# Altium PCB PCB1.PcbDoc
Units mm, origin at the board's own origin, x right, y up, seen from the top; angles counter-clockwise.
Board outline 58.29 x 66.8 mm, 2 copper layers (Top Layer, Bottom Layer); 22 components, 16 nets, 75 pads, 0 vias.
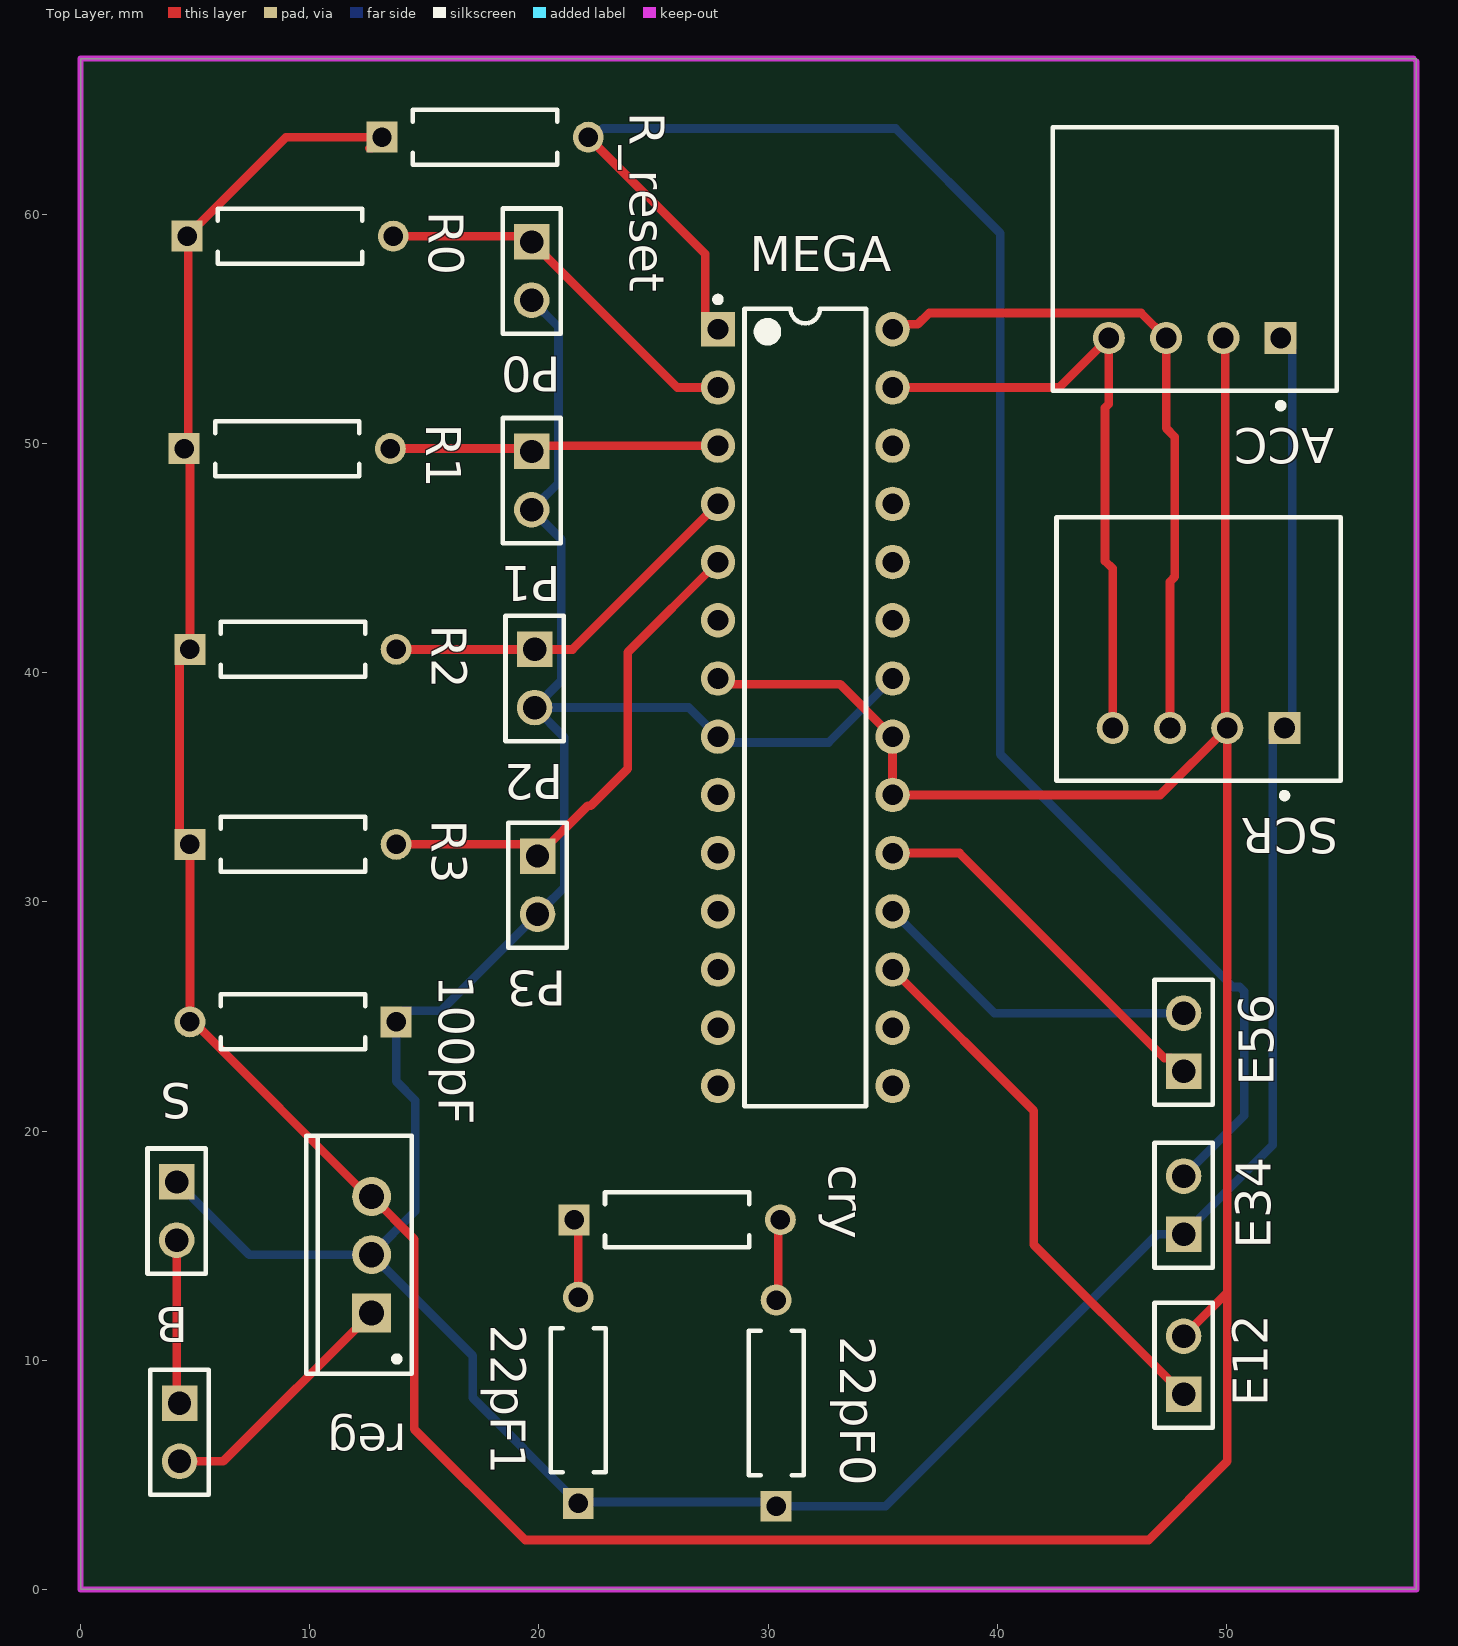
[diagram p0: Top Layer view]
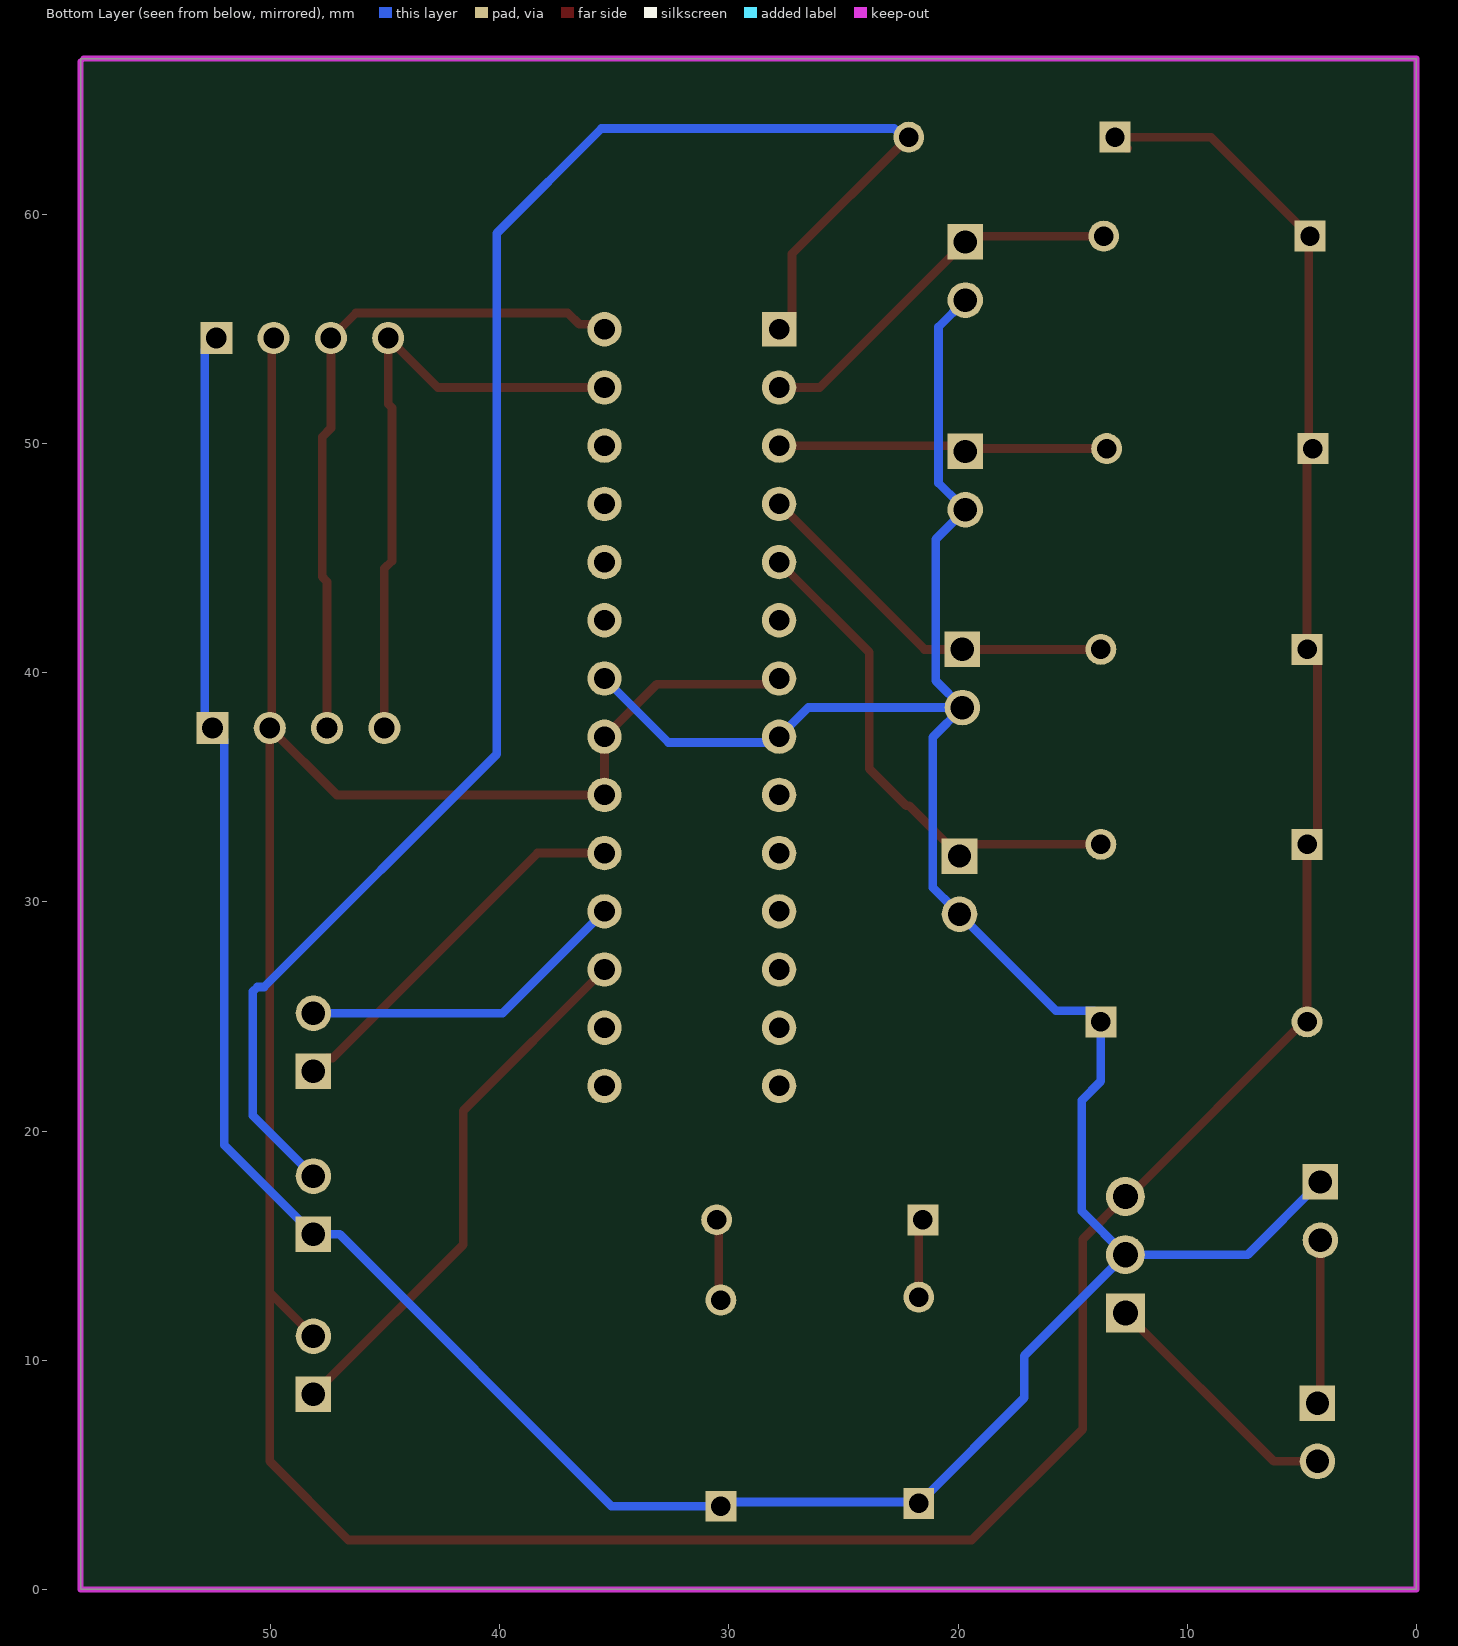
[diagram p1: Bottom Layer view, seen from below]
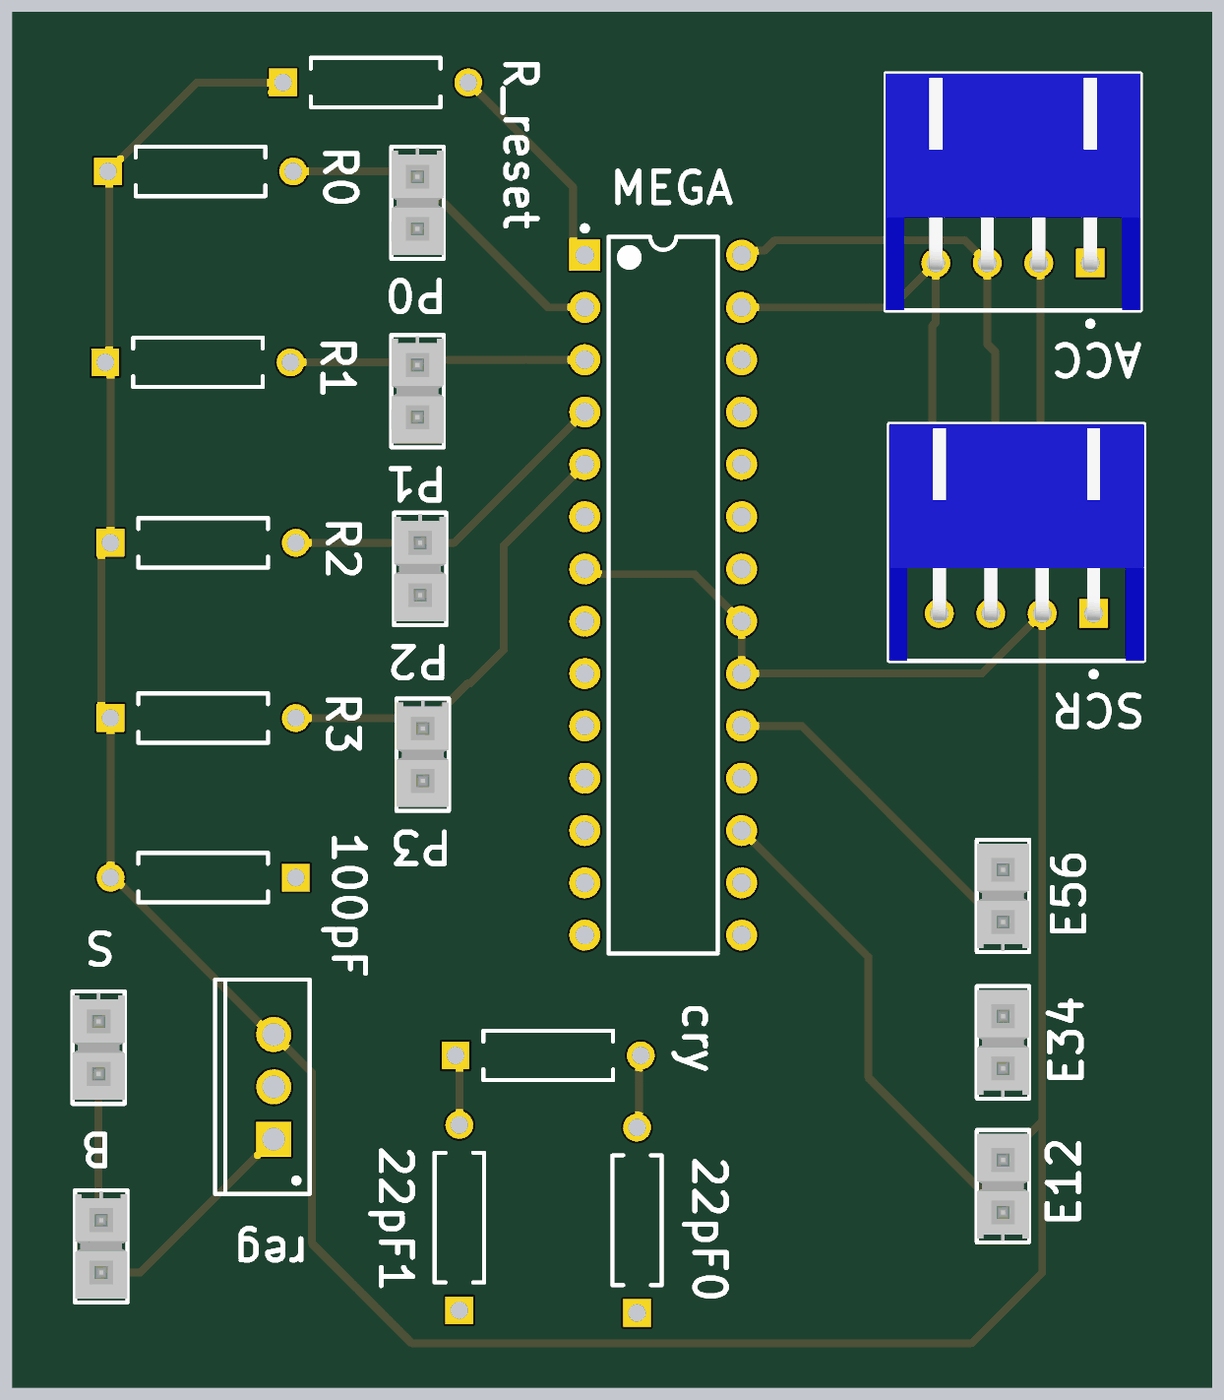
[diagram p2: 3D render of the assembled board from above, using the file's embedded part models]

## Layer stack, top to bottom
Top Solder: solder mask 0.0102, Solder Resist, Dk 3.5
Top Layer: signal copper 0.0356
Dielectric 1: dielectric 0.32, FR-4, Dk 4.8
Bottom Layer: signal copper 0.0356
Bottom Solder: solder mask 0.0102, Solder Resist, Dk 3.5

## Board outline
0,0 58.293,0 58.293,66.802 0,66.802

## Design rules (kind name [scope] priority, off if disabled: settings)
BoardOutlineClearance [All] p1: gap=0.2 ignorepadtopadclearanceinfootprint=FALSE except(0.4: Arc-SplitBarrior Arc-SplitContinuation Track-SplitBarrior Track-SplitContinuation SMDPad-SplitBarrior SMDPad-SplitContinuation THPad-SplitBarrior THPad-SplitContinuation Via-SplitBarrior Via-SplitContinuation Fill-SplitBarrior Fill-SplitContinuation Poly-SplitBarrior Poly-SplitContinuation Region-SplitBarrior Region-SplitContinuation Text-SplitBarrior Text-SplitContinuation)
Clearance "Clearance Bottom Layer" [OnLayer('Bottom Layer')] p1: gap=0.203 ignorepadtopadclearanceinfootprint=TRUE except(0.254: Arc-Text Track-Text SMDPad-Text THPad-Text Via-Text Fill-Text Poly-Text Region-Text Text-Text)
Clearance "Clearance Top Layer" [OnLayer('Top Layer')] p2: gap=0.203 ignorepadtopadclearanceinfootprint=TRUE except(0.254: Arc-Text Track-Text SMDPad-Text THPad-Text Via-Text Fill-Text Poly-Text Region-Text Text-Text)
Clearance [All] p3: gap=0.2 ignorepadtopadclearanceinfootprint=FALSE except(0.089: Arc-Arc Arc-Track Arc-SMDPad Track-Track Track-SMDPad SMDPad-SMDPad; 0.127: Arc-Via Track-Via SMDPad-Via THPad-Via Via-Via; 0.254: Arc-Text Track-Text SMDPad-Text THPad-Text Via-Text Fill-Text Poly-Text Region-Text Text-Text)
HoleSize [All] p1: absolutevalues=TRUE maxlimit=6.3 minlimit=0.2 maxpercent=80.000 minpercent=20.000
MinimumAnnularRing [All] p1: minimumring=0.076
MinimumSolderMaskSliver [All] p1: minsoldermaskwidth=0.1
PolygonConnect PolygonConnect_1 [All] p1: thpad.connectstyle=Relief thpad.reliefconductorwidth=0.508 thpad.reliefentries=4 thpad.polygonreliefangle="90 Angle" thpad.airgapwidth=0.254 smdpad.connectstyle=Relief smdpad.reliefconductorwidth=0.508 smdpad.reliefentries=4 smdpad.polygonreliefangle="90 Angle" smdpad.airgapwidth=0.254 via.connectstyle=Direct via.reliefconductorwidth=0.508 via.reliefentries=4 via.polygonreliefangle="90 Angle" via.airgapwidth=0.254
RoutingCorners [All] p1: cornerstyle=Round minsetback=2.54 maxsetback=2.54
RoutingVias [All] p1: holewidth=0.5 width=1 viastyle="Through Hole" minholewidth=0.2 minwidth=0.45 maxholewidth=1 maxwidth=2
SilkToSilkClearance [All] p1: silktosilkclearance=0.1
SilkToSolderMaskClearance [IsPad] p1: minsilkscreentomaskgap=0.1 clearancetoexposedcopper=TRUE
SolderMaskExpansion [All] p1: expansion=0.102 istentingtop=FALSE
Width [All] p1: maxlimit=2.54 minlimit=0.089 preferedwidth=0.381
25 further rules are at their usual default settings.

## Components (designator, comment, footprint, x,y, rotation, side; value= is the part's Value field where it differs from the comment)
22pF0 "MFR-25FBF52-475R" RESA60-630X240 30.353,8.128 r90 top value=475
22pF1 "MFR-25FBF52-475R" RESA60-630X240 21.717,8.255 r90 top value=475
100pF "MFR-25FBF52-475R" RESA60-630X240 9.271,24.765 r180 top value=475
ACC "S4B-XH-A(LF)(SN)" JST-S4B-XH-A(LF)(SN)_V 48.621,54.61 r180 top
B "battery connector" SMTC-TSW-102-26-XX-S 4.318,8.128 r270 top
cry "MFR-25FBF52-475R" RESA60-630X240 26.035,16.129 r0 top value=475
E12 "battery connector" SMTC-TSW-102-26-XX-S 48.133,8.509 r90 top
E34 "battery connector" SMTC-TSW-102-26-XX-S 48.133,15.494 r90 top
E56 "battery connector" SMTC-TSW-102-26-XX-S 48.133,22.606 r90 top
MEGA "ATMEGA328P-PU" ATML-28P3 31.623,38.481 r0 top (schematic designator U?)
P0 "battery connector" SMTC-TSW-102-26-XX-S 19.685,58.801 r270 top
P1 "battery connector" SMTC-TSW-102-26-XX-S 19.685,49.657 r270 top
P2 "battery connector" SMTC-TSW-102-26-XX-S 19.812,41.021 r270 top
P3 "battery connector" SMTC-TSW-102-26-XX-S 19.939,32.004 r270 top
R0 "MFR-25FBF52-475R" RESA60-630X240 9.144,59.055 r0 top value=475
R1 "MFR-25FBF52-475R" RESA60-630X240 9.017,49.784 r0 top value=475
R2 "MFR-25FBF52-475R" RESA60-630X240 9.271,41.021 r0 top value=475
R3 "MFR-25FBF52-475R" RESA60-630X240 9.271,32.512 r0 top value=475
R_reset "MFR-25FBF52-475R" RESA60-630X240 17.653,63.373 r0 top value=475
reg "L7805CV" TO220 12.7,14.605 r90 top
S "battery connector" SMTC-TSW-102-26-XX-S 4.191,17.78 r270 top
SCR "S4B-XH-A(LF)(SN)" JST-S4B-XH-A(LF)(SN)_V 48.788,37.592 r180 top

## Footprints (in the part's own frame and the unit in brackets; to place one, negate y for a bottom-side part, rotate by r counter-clockwise, add the part's x,y. Pads: shape width x height; smd on the part's side, far side on the other; paste and mask are expansions set on the pad)
ATML-28P3 [mm] "DIP, 28-Leads, Body 34.8x7.2mm, Pitch 2.54mm"
  rect 1.5x1.5 hole 0.9: 1(-3.81,16.51)
  round 1.5 hole 0.9: 2(-3.81,13.97) 3(-3.81,11.43) 4(-3.81,8.89) 5(-3.81,6.35) 6(-3.81,3.81) 7(-3.81,1.27) 8(-3.81,-1.27) 9(-3.81,-3.81) 10(-3.81,-6.35) 11(-3.81,-8.89) 12(-3.81,-11.43) 13(-3.81,-13.97) 14(-3.81,-16.51) 15(3.81,-16.51) 16(3.81,-13.97) 17(3.81,-11.43) 18(3.81,-8.89) 19(3.81,-6.35) 20(3.81,-3.81) 21(3.81,-1.27) 22(3.81,1.27) 23(3.81,3.81) 24(3.81,6.35) 25(3.81,8.89) 26(3.81,11.43) 27(3.81,13.97) 28(3.81,16.51)
  silkscreen extent -3.93,-17.4 2.65,17.93, body extent -3.95,-17.4 3.95,17.4, height 4.58
JST-S4B-XH-A(LF)(SN)_V [mm] "Header, 4-Leads, Body 12.4x11.5mm, Pitch 2.5mm"
  rect 1.4x1.4 hole 0.9: 1(-3.75,0)
  round 1.4 hole 0.9: 2(-1.25,0) 3(1.25,0) 4(3.75,0)
  silkscreen extent -6.2,-9.2 6.2,3.08, body extent -6.2,-9.2 6.2,2.3, height 6.15
RESA60-630X240 [mm] "Axial Resistor, 2-Leads, Dia 2.4mm, Body Length 6.3mm"
  rect 1.35x1.35 hole 0.85: 1(-4.5,0)
  round 1.35 hole 0.85: 2(4.5,0)
  silkscreen extent -3.15,-1.2 3.15,1.2, body extent -4.77,-1.19 4.77,1.2, height 2.4
SMTC-TSW-102-26-XX-S [mm] ".025 SQ Post Terminal Strip Assembly, 1x2 Pins, Vertical, 2.54mm Pitch, Male"
  rect 1.55x1.55 hole 1.02: 1(0,0)
  round 1.55 hole 1.02: 2(2.54,0)
  silkscreen extent -1.46,-1.27 4,1.27, body extent -1.4,-1.27 3.81,1.27, height 8.38
TO220 [mm] "TO, Thru-Hole, Vertical, Heatsink Mounted; 3 In-Line Leads; Pitch 2.54 mm"
  rect 1.7x1.7 hole 1.1: 1(-2.54,0)
  round 1.7 hole 1.1: 2(0,0) 3(2.54,0)
  silkscreen extent -5.2,-1.75 5.2,2.85, body extent -5.25,-1.8 5.25,2.9, height 19.7

## Part data
22pF0 22pF1 100pF cry R0 R1 R2 R3 R_reset: library part CMP-009-00056-3, "Axial Resistor, 475 Ohm, +/- 1%, 0.25 W, -55 to 155 degC, 2-Pin THD, RoHS, Bulk", Case/Package=Axial, Manufacturer=Yageo, Max Operating Temperature=155°C, Min Operating Temperature=-55°C, Package Description="2-Pin Axial Lead, Dia 2.4 mm, Body Length 6.3 mm", Package Quantity=200, Package Reference=MFR-25, Power=250mW, Tolerance=1%, Voltage Rating=250V, Datasheet URL=http://www.yageo.com/documents/recent/Yageo%20LR_MFR_2013.pdf, Datasheet Version=Apr-13, Manufacturer URL=http://www.yageo.com/, Mounting Technology=TH, Packaging=Bulk, RoHS Compliant=True
ACC SCR: library part CMP-002-00034-1, "Male Header, Pitch 2.5 mm, 1 x 4 Position, Height 6.1 mm, Tail Length 3.4 mm, -25 to 85 degC, RoHS, Bulk", Manufacturer=JST, Max Operating Temperature=85°C, Min Operating Temperature=-25°C, Package Description="XH Series Disconnectable Crimp Style Connector, Pitch 2.5 mm, 1 x 4 Position, Height 6.1 mm, Tail Length 3.4 mm", Case/Package=S4B-XH-A(LF)(SN), Connector Type=Header, Datasheet URL=http://www.jst-mfg.com/product/pdf/eng/eXH.pdf, Datasheet Version=May-16, Gender=Male, Manufacturer URL=http://www.jst.com/home2.html, Mounting Technology=TH, Package Reference=S4B-XH-A(LF)(SN), RoHS Compliant=Unknown
B E12 E34 E56 P0 P1 P2 P3 S: library part CMP-002-00089-1, "Headers & Wire Housings Classic PCB Header Strips, 0.100 pitch", Flammability Rating="UL94 V-0", Housing Color=Black, Max Current Rating=7.6A, Max Operating Temperature=125°C, Max Voltage Rating (AC)=550V, Min Operating Temperature=-55°C, Package Quantity=1, Voltage Rating=500V, Contact Gender=Male, Contact Material=Bronze, Contact Mating Length=5.84mm, Contact Plating=Gold, Contact Post Length=3.2mm, Contact Type=-, Depth=2.54mm, Gender=Male, Housing Material=Polyester, Length=5.08mm, Number of Contacts=2, Number of Positions=2, Number of Rows=1, Orientation=Vertical, Packaging=Bulk, Pitch=2.54mm, Radiation Hardening=No, REACH SVHC="No SVHC", RoHS Compliant=Yes, Series=TSW, Termination="Through Hole", Weight=0.001257oz
MEGA: library part CMP-020-00004-2, "8-Bit Microcontroller with 32 KBytes In-System Programmable Flash, 23 I/Os, -40 to 85 degC, 28-Pin PDIP (28P3), RoHS, Tube", Case/Package=DIP, Manufacturer=Atmel, Max Clock Frequency=20MHz, Max Operating Temperature=85°C, Max Supply Voltage=5.5V, Min Operating Temperature=-40°C, Min Supply Voltage=1.8V, Package Description="28-Pin Plastic Dual Inline Package, Body 34.671 x 7.3025 mm, Pitch 2.54 mm", Package Quantity=14, Package Reference=28P3, Package Version="Rev. B, 09/2001", Datasheet URL=http://www.atmel.com/images/Atmel-8271-8-bit-AVR-Microcontroller-ATmega48A-48PA-88A-88PA-168A-168PA-328-328P_datasheet_Complete.pdf, Datasheet Version="Rev. 8271J, 11/2015", Density=32KB, Ethernet Channels=0, I/Os=23, Interface=USART, Manufacturer URL=http://www.atmel.com/, Mounting Technology=TH, Package URL=http://www.atmel.com/images/Atmel-8271-8-bit-AVR-Microcontroller-ATmega48A-48PA-88A-88PA-168A-168PA-328-328P_datasheet_Complete.pdf, Packaging=Rail/Tube, Pins=28, RAM Size=2KB, RoHS Compliant=True
reg: library part CMP-019-00018-2, "Positive Voltage Regulator IC, 1.5 A, 5 V, 0 to 125 degC, 3-Pin TO-220, RoHS, Tube", Case/Package=TO-220, Dropout Voltage=2V, Manufacturer=STMicroelectronics, Max Input Voltage=35V, Max Operating Temperature=125°C, Max Ouput Current=1.5A, Max Supply Voltage=20V, Min Input Voltage=7V, Min Operating Temperature=0°C, Min Supply Voltage=8V, Nominal Output Voltage=5V, Package Quantity=50, Datasheet URL=https://datasheet.ciiva.com/15111/getdatasheetpartid-44136-15111027.pdf, Datasheet Version="Rev 30, 09/2012", Manufacturer URL=http://www.st.com/, Mounting Technology=TH, Output Current=1.5A, Output Voltage=5V, Outputs=1, Packaging=Rail/Tube, Pins=3, RoHS Compliant=True

## Nets (pads, with @x,y where several pads share a name; then routed paths per layer and width w, separated by ;. In a path a pad name is that pad's centre, name@x,y a point inside that pad or via, vN(x,y) a via of type N, cw(c..) or ccw(c..) an arc to the next point about the centre after c; other vN are vias at no path point)
GND: 22pF0.1 22pF1.1 100pF.1 ACC.1 E34.1 MEGA.8 MEGA.22 P0.2 P1.2 P2.2 P3.2 reg.2 S.1 SCR.1 | length 165.2
  Bottom Layer w0.381: S.1 7.366,14.605 reg.2 ; P0.2 20.854,55.092 20.854,48.286 19.939,47.371 19.558,47.371 19.685,47.244 P1.2 20.981,45.821 20.981,39.65 P2.2 ; MEGA.22 32.639,36.957 28.321,36.957 28.067,37.211 MEGA.8 26.543,38.481 P2.2 ; ACC.1 52.881,54.1 52.881,37.543 SCR.1@52.856,37.568 ; SCR.1 SCR.1@52.832,37.592 ; reg.2 17.111,10.194 17.111,8.361 21.59,3.882 21.59,3.683 21.662,3.755 22pF1.1 21.772,3.81 30.353,3.81 22pF0.1 35.124,3.628 46.99,15.494 E34.1 52.028,19.389 52.028,37.082 52.514,37.568 SCR.1@52.856,37.568 ; reg.2 14.605,16.51 14.605,21.336 13.771,22.17 100pF.1 13.771,24.947 14.073,25.249 15.724,25.249 P3.2 19.939,29.591 20.066,29.718 20.193,29.718 21.108,30.633 21.108,37.185 P2.2 ; SCR.1@52.832,37.592 SCR.1@52.856,37.568 ; SCR.1@52.832,37.592 SCR.1@52.856,37.568
Net22pF0_2: 22pF0.2 cry.2 | length 3.8
  Top Layer w0.381: 22pF0.2 30.535,12.628 30.607,12.7 30.444,12.863 30.444,16.038 cry.2
Net22pF1_2: 22pF1.2 cry.1 | length 3.2
  Top Layer w0.381: 22pF1.2 cry.1@21.717,15.947
Net100pF_2: 100pF.2 ACC.2 E12.2 MEGA.7 MEGA.20 MEGA.21 R0.1 R1.1 R2.1 R3.1 R_reset.1 reg.3 SCR.2 | length 186.9
  Top Layer w0.381: R_reset.1@12.597,62.889 12.668,62.889 R_reset.1 8.962,63.373 R0.1 4.699,59 4.699,49.966 R1.1 4.548,49.784 4.771,49.561 R2.1 4.318,40.568 4.318,32.512 R3.1 4.771,25.091 4.572,24.892 4.699,24.765 100pF.2 4.926,24.765 12.545,17.145 reg.3 14.564,15.281 14.564,6.995 19.4,2.159 46.609,2.159 50.038,5.588 50.038,12.954 ; MEGA.7@27.686,40.132 27.813,40.005 MEGA.7 27.813,39.497 27.853,39.537 28.33,39.537 28.37,39.497 33.147,39.497 MEGA.21 MEGA.20 47.117,34.671 SCR.2 ; E12.2 50.038,12.954 ; ACC.2 49.955,54.527 49.955,38.063 50.171,37.846 50.038,37.713 SCR.2 ; 50.038,12.954 SCR.2
NetACC_3: ACC.3 MEGA.28 SCR.3 | length 30
  Top Layer w0.381: MEGA.28 35.647,55.205 36.536,55.205 37.035,55.704 46.277,55.704 ACC.3 47.371,50.673 47.752,50.292 47.752,44.187 47.538,43.973 SCR.3
NetACC_4: ACC.4 MEGA.27 SCR.4 | length 28.1
  Top Layer w0.381: MEGA.27 35.433,52.07 35.814,52.451 42.712,52.451 ACC.4 44.871,51.729 44.704,51.562 44.704,44.882 45.038,44.548 SCR.4
NetB_1: B.1 S.2 | length 7.2
  Top Layer w0.381: S.2 4.191,8.255 B.1
NetB_2: B.2 reg.1 | length 11.1
  Top Layer w0.381: B.2 6.223,5.588 reg.1
NetE12_1: E12.1 MEGA.17 | length 24
  Top Layer w0.381: MEGA.17 41.598,20.886 41.598,15.044 47.625,9.017 47.625,8.636 47.752,8.509 E12.1
NetE34_2: E34.2 MEGA.1 R_reset.2 | length 78.9
  Top Layer w0.381: R_reset.2 27.253,58.273 27.253,55.551 27.559,55.245 28.067,55.245 MEGA.1
  Bottom Layer w0.381: R_reset.2 22.415,63.373 22.796,63.754 35.56,63.754 40.132,59.182 40.132,36.449 50.292,26.289 50.577,26.289 50.778,26.088 50.778,20.679 E34.2 48.133,18.288 47.879,18.542 47.753,18.416 E34.2@47.751,18.416
NetE56_1: E56.1 MEGA.19 | length 16.8
  Top Layer w0.381: MEGA.19 38.354,32.131 47.295,23.19 47.549,23.19 47.752,22.987 47.752,22.733 47.879,22.606 E56.1
NetE56_2: E56.2 MEGA.18 | length 14.5
  Bottom Layer w0.381: MEGA.18 39.878,25.146 E56.2
NetP0_1: MEGA.2 P0.1 R0.2 | length 17.1
  Top Layer w0.381: R0.2 19.304,59.055 19.431,59.182 19.685,58.928 P0.1 26.035,52.451 MEGA.2
NetP1_1: MEGA.3 P1.1 R1.2 | length 14.7
  Top Layer w0.381: R1.2 19.177,49.784 19.558,49.403 19.685,49.53 P1.1 19.939,49.911 MEGA.3
NetP2_1: MEGA.4 P2.1 R2.2 | length 17.3
  Top Layer w0.381: R2.2 19.558,41.021 19.812,40.767 P2.1 21.463,41.021 27.447,47.005 27.447,47.356 27.432,47.371 MEGA.4
NetP3_1: MEGA.5 P3.1 R3.2 | length 22.5
  Top Layer w0.381: R3.2 19.431,32.512 P3.1 22.136,34.201 22.263,34.201 23.876,35.814 23.876,40.894 MEGA.5
pads on no net: MEGA.6 MEGA.9 MEGA.10 MEGA.11 MEGA.12 MEGA.13 MEGA.14 MEGA.15 MEGA.16 MEGA.23 MEGA.24 MEGA.25 MEGA.26

## Keep-outs
Keep-Out Layer:
  lines w0.254: 0,0 0,66.802 58.166,66.802 58.293,66.675 58.293,0 0,0